# EAGLE board busfahrer_pi (EAGLE 6.4)
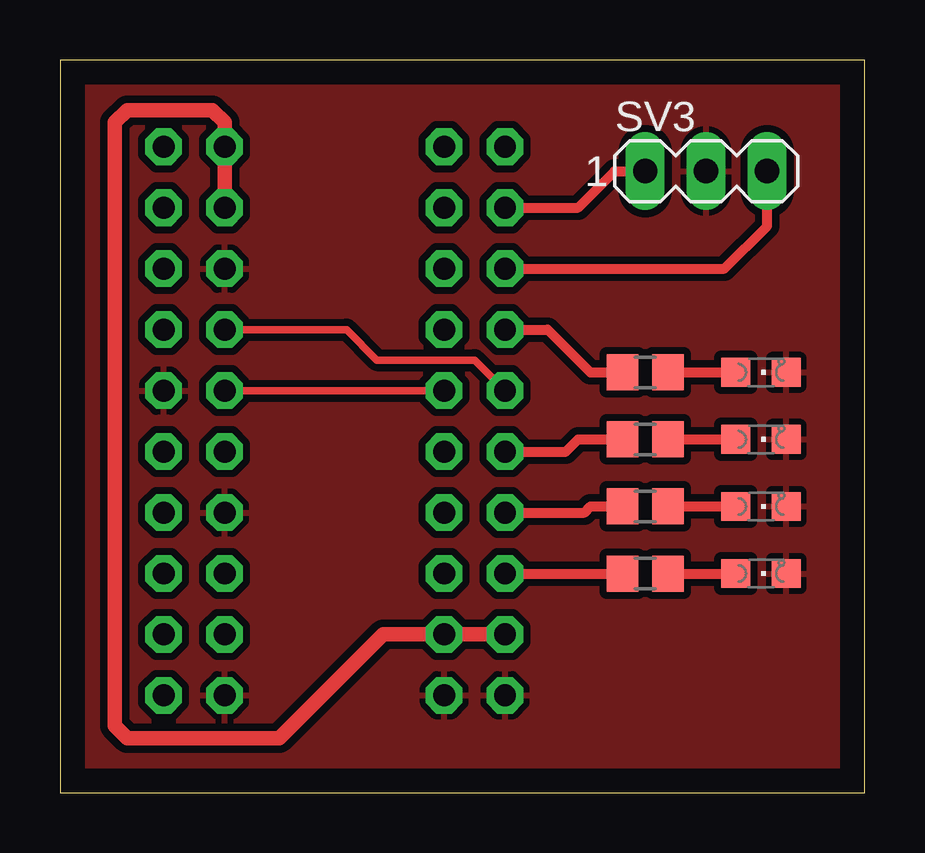
[diagram p0: board, top side]
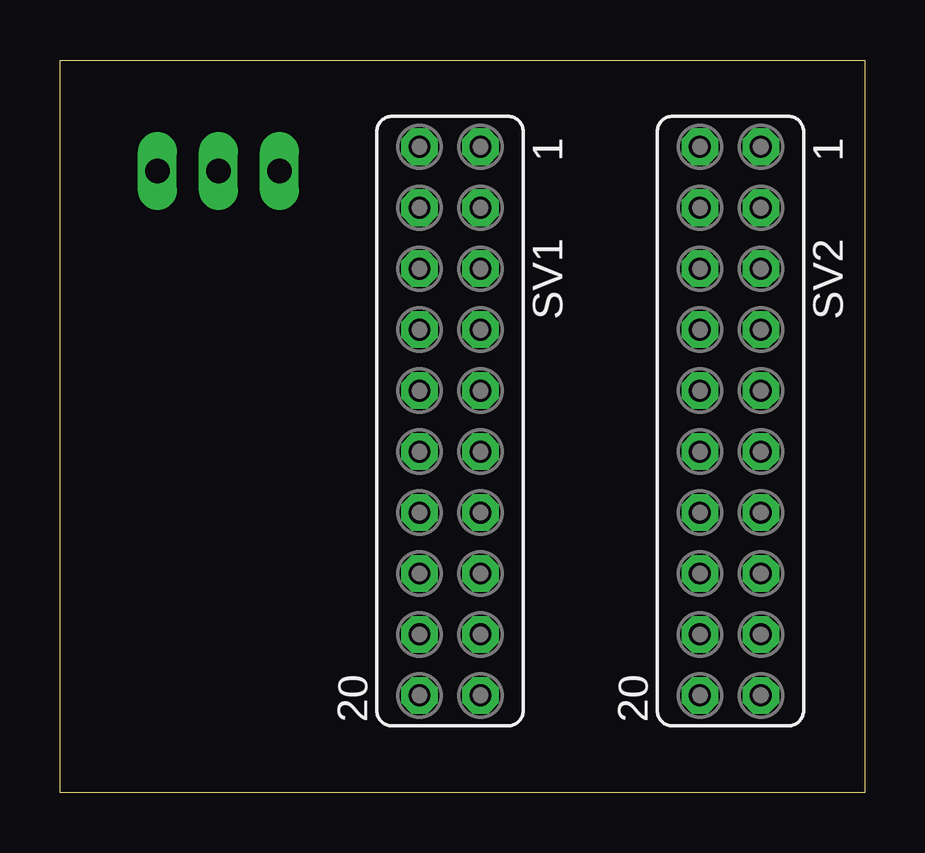
[diagram p1: board, bottom side, seen from below]

Size 33.52 x 30.54 mm. Coordinates in mm from the lower left corner, seen from the top.
Outline: 0,0 33.52,0 33.52,30.54 0,30.54 0,0
Copper layers (1*16): Top 0.035mm / dielectric 1.5mm / Bottom 0.035mm
Design rules "default": minimum track width 10mil, minimum drill 24mil, track to track 8mil, track to pad 8mil, pad to pad 8mil, via to via 8mil, smd to smd 8mil, copper to edge 40mil, drill to drill 8mil, minimum pad ring 12mil, minimum via ring 12mil, stop-mask expansion 4mil, vias tented up to drill 0mil, thermal gap 10mil

## Footprints (pad centres in the part's own frame; a part is rotated, then mirrored left to right if it is on the bottom)
CHIPLED_0805 = smd 1.2 x 1.2: A 0,-1.05; C 0,1.05
R0805 = smd 1.3 x 1.5: 1 -0.95,0; 2 0.95,0
FE10-2 = drill 0.914 octagon: 1 -11.43,1.27; 2 -11.43,-1.27; 3 -8.89,1.27; 4 -8.89,-1.27; 5 -6.35,1.27; 6 -6.35,-1.27; 7 -3.81,1.27; 8 -3.81,-1.27; 9 -1.27,1.27; 10 -1.27,-1.27; 11 1.27,1.27; 12 1.27,-1.27; 13 3.81,1.27; 14 3.81,-1.27; 15 6.35,1.27; 16 6.35,-1.27; 17 8.89,1.27; 18 8.89,-1.27; 19 11.43,1.27; 20 11.43,-1.27
MA03-1 = drill 1.016 long: 1 -2.54,0; 2 0,0; 3 2.54,0

## Placement (x,y rotation side)
LED2  [CHIPLED_0805]  29.21,17.53 270 top
LED4  [CHIPLED_0805]  29.21,14.73 270 top
LED5  [CHIPLED_0805]  29.21,11.94 270 top
LED6  [CHIPLED_0805]  29.21,9.14 270 top
R2  470  [R0805]  24.38,17.53 0 top
R4  470  [R0805]  24.38,14.73 0 top
R5  470  [R0805]  24.38,11.94 0 top
R6  470  [R0805]  24.38,9.14 0 top
SV1  [FE10-2]  17.27,15.49 270 bottom
SV2  [FE10-2]  5.59,15.49 270 bottom
SV3  [MA03-1]  26.92,25.91 0 top

## Library data of the parts
LED2 LED4-LED6 = led
R2 R4-R6 = rcl
SV1 SV2 = con-lsta; OC_FARNELL: unknown; OC_NEWARK: unknown
SV3 = con-lstb; OC_FARNELL: unknown; OC_NEWARK: unknown

## Nets
+5V: SV1.17 SV1.18 SV2.2 SV2.4
GND: LED2.C LED4.C LED5.C LED6.C SV1.19 SV1.20 SV2.6 SV2.9 SV2.14 SV2.20 SV3.2
LED_2: R2.1 SV1.8
LED_4: R4.1 SV1.12
LED_5: R5.1 SV1.14
LED_6: R6.1 SV1.16
N$8: LED2.A R2.2
N$10: LED4.A R4.2
N$11: LED5.A R5.2
N$12: LED6.A R6.2
PWR_SW_1: SV1.4 SV3.1
PWR_SW_2: SV1.6 SV3.3
RXD_PI: SV1.9 SV2.10
TXD_PI: SV1.10 SV2.8

## Tracks (layer width: path | path; a pad name or v marks a point on that pad's centre or on a via)
+5V
  Top 0.61: SV1.18 SV1.17 13.46,6.6 9.14,2.29 2.79,2.29 2.29,2.79 2.29,27.94 2.79,28.45 6.35,28.45 6.86,27.94 SV2.2 SV2.4
GND
  pour Top (isolate 0.305): -1.27,31.75 35.05,31.75 35.05,-1.27 -1.52,-1.27
LED_2
  Top 0.406: SV1.8 20.32,19.3 22.1,17.53 R2.1
LED_4
  Top 0.406: SV1.12 21.08,14.22 21.59,14.73 R4.1
LED_5
  Top 0.406: SV1.14 21.84,11.68 22.1,11.94 R5.1
LED_6
  Top 0.406: SV1.16 R6.1
N$8
  Top 0.406: R2.2 LED2.A
N$10
  Top 0.406: R4.2 LED4.A
N$11
  Top 0.406: R5.2 LED5.A
N$12
  Top 0.406: R6.2 LED6.A
PWR_SW_1
  Top 0.406: SV1.4 21.59,24.38 23.11,25.91 SV3.1
PWR_SW_2
  Top 0.406: SV1.6 27.69,21.84 29.46,23.62 SV3.3
RXD_PI
  Top 0.305: SV2.10 SV1.9
TXD_PI
  Top 0.305: SV2.8 11.94,19.3 13.21,18.03 17.27,18.03 SV1.10